# Altium PCB LIMIT_SW_Breakout.pcbdoc
Units mil, origin at the board's own origin, x right, y up, seen from the top; angles counter-clockwise.
Board outline 939.96 x 3877.95 mil, 2 copper layers (Top Layer, Bottom Layer), stack 21 mil thick; 29 components, 21 nets, 79 pads, 2 vias.
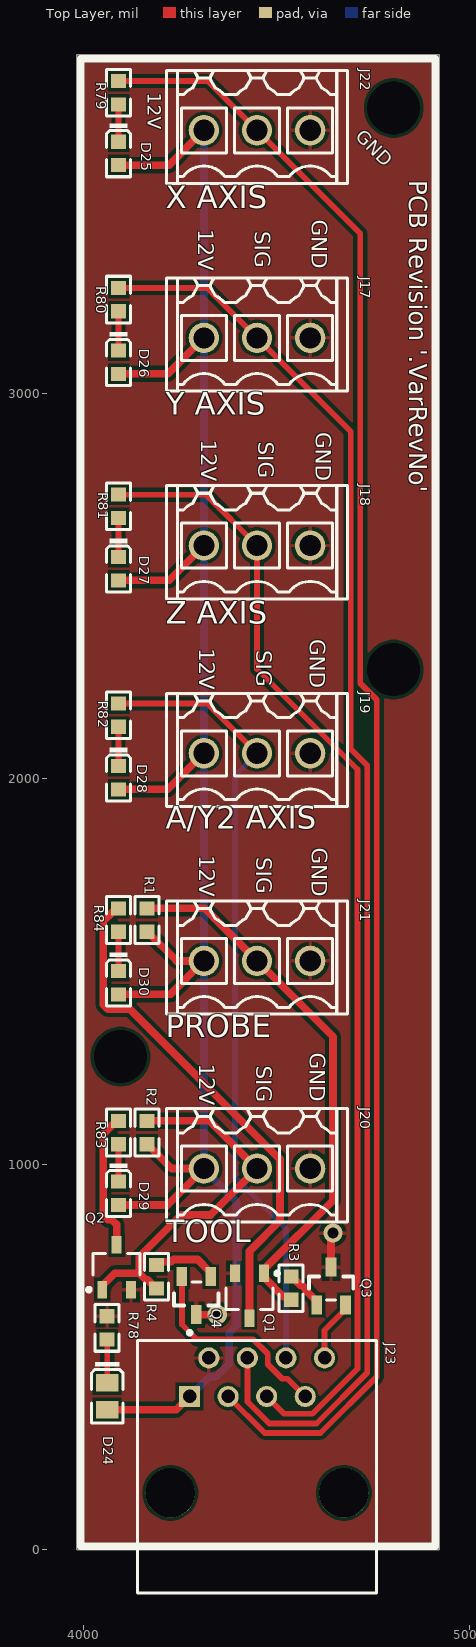
[diagram p0: Top Layer view]
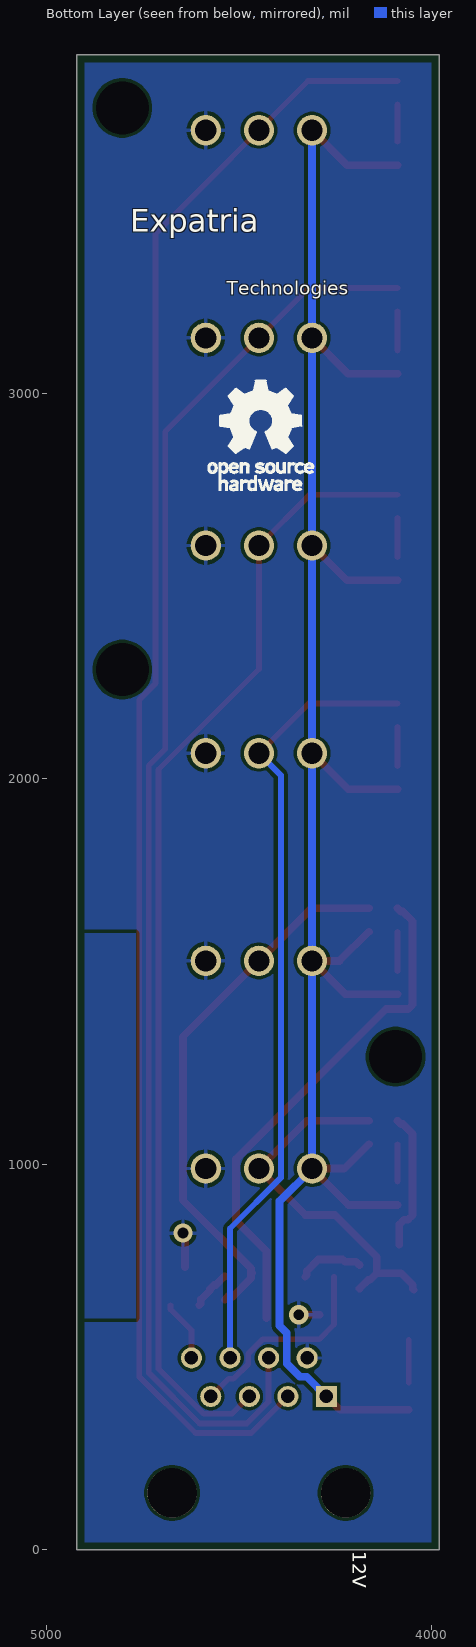
[diagram p1: Bottom Layer view, seen from below]
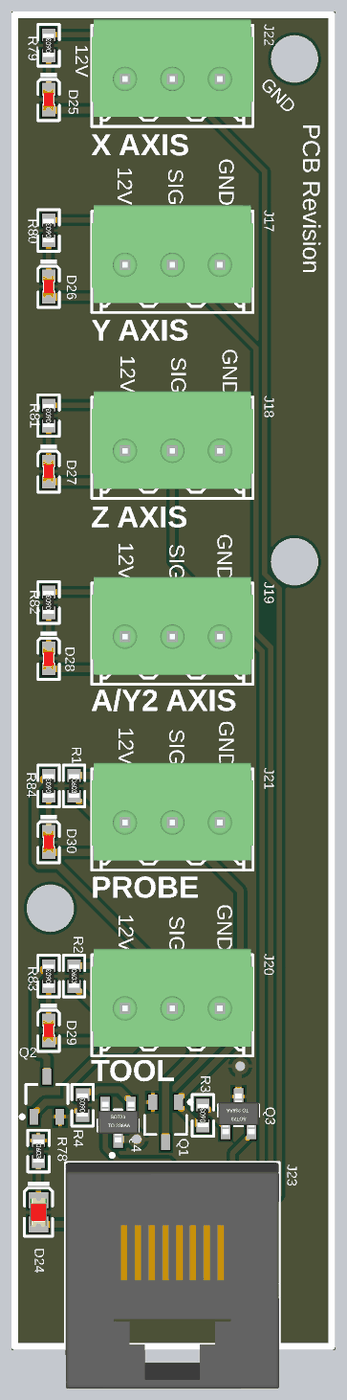
[diagram p2: 3D render of the assembled board from above, using the file's embedded part models]

## Layer stack, top to bottom
Top Solder: solder mask 0.4, Solder Resist, Dk 3.5
Top Layer: signal copper 1.4
Dielectric 3: prepreg 2.8, PP-006, Dk 4.1
Dielectric1: dielectric 12.6, FR-4, Dk 4.8
Dielectric 4: prepreg 2.8, PP-006, Dk 4.1
Bottom Layer: signal copper 1.4
Bottom Solder: solder mask 0.4, Solder Resist, Dk 3.5

## Board outline
3981.3,0 3981.3,3877.95 4921.26,3877.95 4921.26,0

## Design rules (kind name [scope] priority, off if disabled: settings)
BoardOutlineClearance [OnLayer('Top Layer')] p1: gap=20 ignorepadtopadclearanceinfootprint=FALSE
BoardOutlineClearance BoardOutlineClearance_3 [OnLayer('GND')] p2: gap=20 ignorepadtopadclearanceinfootprint=FALSE
BoardOutlineClearance BoardOutlineClearance_2 [OnLayer('PWR')] p3: gap=20 ignorepadtopadclearanceinfootprint=FALSE
BoardOutlineClearance BoardOutlineClearance_1 [OnLayer('Bottom Layer')] p4: gap=20 ignorepadtopadclearanceinfootprint=FALSE
Clearance [All] p1: gap=10 ignorepadtopadclearanceinfootprint=TRUE except(0: SMDPad-Hole Fill-Hole Poly-Hole Region-Hole Text-Hole; 8: SMDPad-Fill SMDPad-Poly SMDPad-Region THPad-Fill THPad-Poly THPad-Region Via-Fill Via-Poly Via-Region; 12: SMDPad-Via THPad-Via; 19.68: THPad-Hole Via-Hole; 20: SMDPad-SMDPad SMDPad-THPad THPad-THPad)
Clearance "Pad Clearance" [IsPad vs IsPad] p2: gap=10 ignorepadtopadclearanceinfootprint=TRUE except(0: Arc-Hole Track-Hole SMDPad-Hole THPad-Hole Via-Hole Fill-Hole Poly-Hole Region-Hole Text-Hole; 8: Arc-Arc Arc-Track Arc-Fill Arc-Poly Arc-Region Track-Track Track-Fill Track-Poly Track-Region SMDPad-Fill SMDPad-Poly SMDPad-Region THPad-Fill THPad-Poly THPad-Region Via-Fill Via-Poly Via-Region; 12: SMDPad-Via THPad-Via; 20: SMDPad-SMDPad SMDPad-THPad THPad-THPad)
DiffPairsRouting [All] p1: maxlimit=10 minlimit=8 mostfreqgap=8 toplayer_minwidth=6 toplayer_maxwidth=15 toplayer_prefwidth=10 bottomlayer_minwidth=6 bottomlayer_maxwidth=15 bottomlayer_prefwidth=10 maxuncoupledlength=500
HoleSize [All] p1: absolutevalues=TRUE maxlimit=200 minlimit=1 maxpercent=80.000 minpercent=20.000
MinimumAnnularRing [All] p1: minimumring=6.3
MinimumSolderMaskSliver [All] p1: minsoldermaskwidth=5
PolygonConnect [All] p1: connectstyle=Relief reliefconductorwidth=10 reliefentries=4 polygonreliefangle="90 Angle" airgapwidth=10
RoutingVias [All] p1: holewidth=28 width=50 viastyle="Through Hole" minholewidth=28 minwidth=50 maxholewidth=28 maxwidth=50 useviatemplates=TRUE viatemplateguid#1={29321985-CF2A-4769-A0B6-67998678A9C6} viatemplatename#1=v70h35m0mx0
SilkToSolderMaskClearance SilkscreenOverComponentPads [IsPad] p1: minsilkscreentomaskgap=10 clearancetoexposedcopper=TRUE
SolderMaskExpansion [All] p1: expansion=4 istentingtop=FALSE
ViasUnderSMD [All] p1: allowed=FALSE
Width [All] p1: maxlimit=200 minlimit=10 preferedwidth=10 minimp=50.000000 maximp=50.000000 favimp=50.000000
26 further rules are at their usual default settings.

## Components (designator, comment, footprint, x,y, rotation, side; value= is the part's Value field where it differs from the comment)
D24 "0805 Green" 0805_LED_S1 4060.04,398.62 r270 top
D25 "0603 Yellow" 0603_LED_S1 4089.57,3622.05 r270 top
D26 "0603 Yellow" 0603_LED_S1 4089.57,3080.71 r270 top
D27 "0603 Yellow" 0603_LED_S1 4089.57,2545.08 r270 top
D28 "0603 Yellow" 0603_LED_S1 4089.57,2002.95 r270 top
D29 "0603 White" 0603_LED_S1 4089.57,925.2 r270 top
D30 "0603 White" 0603_LED_S1 4089.57,1471.46 r270 top
J17 "" SL_3_50_180G_03 4448.82,3152.32 r0 top
J18 "" SL_3_50_180G_03 4448.82,2613.7 r0 top
J19 "" SL_3_50_180G_03 4448.82,2075.08 r0 top
J20 "" SL_3_50_180G_03 4448.82,997.83 r0 top
J21 "" SL_3_50_180G_03 4448.82,1536.46 r0 top
J22 "" SL_3_50_180G_03 4448.82,3690.94 r0 top
J23 "5555799-1" FP-5555799-1-MFG 4448.82,215.35 r0 top
Q1 "AO3400A N" SOT-23-3L 4429.13,659.45 r90 top
Q2 "AO3400A N" SOT-23-3L 4084.65,733.27 r270 top
Q3 "MMBT5401 2L" SOT-23(SOT-23-3) 4640.75,684.06 r270 top
Q4 "MMBT5401 2L" SOT-23(SOT-23-3) 4291.34,659.45 r90 top
R1 "100KΩ ±1%" 0603_R 4163.39,1633.86 r270 top
R2 "100KΩ ±1%" 0603_R 4163.39,1082.68 r270 top
R3 "2KΩ ±1%" 0603_R 4537.4,679.13 r90 top
R4 "2KΩ ±1%" 0603_R 4187.99,708.66 r90 top
R78 "10KΩ ±1%" 0603_R 4060.04,575.79 r270 top
R79 "2KΩ ±1%" 0603_R 4089.57,3779.53 r90 top
R80 "2KΩ ±1%" 0603_R 4089.57,3243.11 r90 top
R81 "2KΩ ±1%" 0603_R 4089.57,2706.69 r90 top
R82 "2KΩ ±1%" 0603_R 4089.57,2165.35 r90 top
R83 "2KΩ ±1%" 0603_R 4089.57,1082.68 r90 top
R84 "2KΩ ±1%" 0603_R 4089.57,1633.86 r90 top

## Footprints (in the part's own frame and the unit in brackets; to place one, negate y for a bottom-side part, rotate by r counter-clockwise, add the part's x,y. Pads: shape width x height; smd on the part's side, far side on the other; paste and mask are expansions set on the pad)
0603_LED_S1 [mm]
  rect 0.93x0.98 smd: A(0.77,0) K(-0.77,0)
  silkscreen extent -1.98,-0.79 1.54,0.79, body extent -0.8,-0.4 0.8,0.4, height 0.6
0603_R [mm]
  rect 0.93x0.98 smd: 1(-0.77,0) 2(0.77,0)
  silkscreen extent -1.53,-0.79 1.54,0.79, body extent -0.85,-0.4 0.85,0.4, height 0.56
0805_LED_S1 [mm]
  rect 1.16x1.47 smd: A(0.89,0) K(-0.89,0)
  silkscreen extent -2.24,-1.04 1.77,1.03, body extent -1.01,-0.62 1.01,0.62, height 1.1
FP-5555799-1-MFG [mm]
  rect 1.39x1.39 hole 0.89 paste-1000 mask+0: 1(-4.445,4.64)
  round 1.39 hole 0.89 paste-1000 mask+0: 2(-3.175,7.18) 3(-1.905,4.64) 4(-0.635,7.18) 5(0.635,4.64) 6(1.905,7.18) 7(3.175,4.64) 8(4.445,7.18)
  round 3.25 hole 3.25 unplated paste-1000 mask+0: ""(-5.715,-1.71) ""(5.715,-1.71)
  silkscreen extent -7.88,-8.32 7.88,8.96, body extent -7.98,-8.42 7.98,8.42, height 0.25
SL_3_50_180G_03 [mm] "OMNIMATE Signal - Serie BL/SL 3.50  SL 3.50/03/180G 3.2"
  round 2 hole 1.4: A1(-3.5,-0.22) A2(0,-0.22) A3(3.5,-0.22)
  silkscreen extent -5.95,-3.73 5.95,3.73, body extent -5.95,-3.02 5.95,4.18, height 9.3
SOT-23(SOT-23-3) [mm]
  rect 1.25x0.7 smd: 1(1.25,-0.95) 2(1.25,0.95) 3(-1.25,0)
  silkscreen extent -0.65,-1.46 0.9,1.46, body extent -1.5,-1.5 1.5,1.5, height 1.3
SOT-23-3L [mm] "http://www.aosmd.com/res/packaging_information/SOT-23-3L.pdf"
  rect 1.15x0.65 smd: 1(1.475,-0.95) 2(1.475,0.95) 3(-1.475,0)
  silkscreen extent -0.9,-1.95 1.6,1.55, body extent -0.9,-1.55 0.9,1.55, height 1.25

## Part data
D24: library part "0805 LED Green", "LED", Color=Green, Package=0805, SuppliersPartNumber=C2297, Supplier=LC
D25 D26 D27 D28: library part "0603 LED Yellow", "LED", Color=Yellow, Package=0603, SuppliersPartNumber=C72038, Supplier=LC
D29 D30: library part "0603 LED White", "LED", Color=White, Package=0603, SuppliersPartNumber=C2290, Supplier=LC
J17 J18 J19 J20 J21 J22: library part CMP-1559-00904-1, "Header,Male Pin,Covered(4 Sided) 3 1 0.138\"（3.50mm） 3 P=3.5mm Pluggable System Terminal Block RoHS", Manufacturer="Ningbo Kangnex Elec", PartNumber=WJ15EDGVC-3.5-3P, SuppliersPartNumber=C192778, UL_94_flammability_rating=V-0, PackageReference=SL_3_50_180G_03, Packaging=Box, Pitch_inch="0.138 inch", Pitch_mm="3.5 mm", Revision=V1, Short_text_for_material="SL 3.50/03/180G 3.2SN OR BX", Side_termination_characteristic="closed side", Solder_pin_length_mm="3.2 mm"
J23: library part CMP-03371-000003-1, "CONN MOD JACK 8P8C VERT UNSHLD", Manufacturer="TE Connectivity", SuppliersPartNumber=C305983, Temperature="-40°C to +85°C", Temperature Range High=+85°C, Temperature Range Low=-40°C, Device Class L1=Connectors, Device Class L2="Modular / Ethernet Connectors", Device Class L3=unset, Digikey Description="CONN MOD JACK 8P8C VERT UNSHLD", Is Female=yes, Manufacturer Part Number=5555799-1, Mouser Description="Conn RJ-45 F 8 POS 2.54mm Solder ST Thru-Hole 8 Terminal 1 Port Cat 3 Box/Package/Tray", Number of Contacts=8, Octopart=https://octopart.com/5555799-1-te+connectivity-39526335, Package=5555799-1, Pitch=2.54mm
Q1 Q2: library part "AO3400A N道沟 X0YV1T SOT-23", "MOS(场效应管)", Package=SOT-23, SuppliersPartNumber=C700953, ComponentLink1Description=供应商链接, ComponentLink1URL=http://www.szlcsc.com/product/details_21629.html, Supplier=LC
Q3 Q4: library part "SOT-23 MMBT5401 2L", "三极管", Package=SOT-23, SuppliersPartNumber=C8326, ComponentLink1Description=供应商链接, ComponentLink1URL=http://www.szlcsc.com/product/details_8818.html, Supplier=LC
R1 R2: library part "0603 100K (1003) 1%", "Chip resistor", Manufacturer="Uniroyal Elec", Package=0603, PartNumber=0603WAF1003T5E, Power=1/10W, Resistance=100KΩ, SuppliersPartNumber=C25803, Tolerance=1%, ComponentLink1Description="Supplier link", ComponentLink1URL=http://www.szlcsc.com/product/details_26546.html, Supplier=LC
R3 R4 R79 R80 R81 R82 R83 R84: library part "0603 2K (2001) 1%", "Chip resistor", Manufacturer="Uniroyal Elec", Package=0603, PartNumber=0603WAF2001T5E, Power=1/10W, Resistance=2KΩ, SuppliersPartNumber=C22975, Tolerance=1%, ComponentLink1Description="Supplier link", ComponentLink1URL=http://www.szlcsc.com/product/details_23702.html, Supplier=LC
R78: library part "0603 10K (1002) 1%", "Chip resistor", Manufacturer="Uniroyal Elec", Package=0603, PartNumber=0603WAF1002T5E, Power=1/10W, Resistance=10KΩ, SuppliersPartNumber=C25804, Tolerance=1%, ComponentLink1Description="Supplier link", ComponentLink1URL=http://www.szlcsc.com/product/details_26547.html, Supplier=LC

## Free pads (board coordinates)
  round 0 hole 137.8 unplated: 0(4094.49,1279.53) 0(4803.15,2283.46) 0(4803.15,3740.16)

## Via types
v1: diameter 50, hole 28, Top Layer to Bottom Layer, tented both sides, 2 vias

## Nets (pads, with @x,y where several pads share a name; then routed paths per layer and width w, separated by ;. In a path a pad name is that pad's centre, name@x,y a point inside that pad or via, vN(x,y) a via of type N, cw(c..) or ccw(c..) an arc to the next point about the centre after c; other vN are vias at no path point)
+12V_SWITCH: D24.A D25.A D26.A D27.A D28.A D29.A D30.A J17.A1 J18.A1 J19.A1 J20.A1 J21.A1 J22.A1 J23.1 R1.2 R2.2 | length 5516.4
  Top Layer w20: D24.A 4239.37,363.58 J23.1 ; D29.A 4216.73,894.88 J20.A1 4227.56,989.17 4164.37,1052.36 R2.2 ; D30.A 4224.37,1441.14 J21.A1 4240.12,1527.8 4164.37,1603.54 R1.2 ; D28.A 4217.24,1972.64 J19.A1 ; D27.A 4220.75,2514.76 J18.A1 ; D26.A 4217.76,3050.39 J17.A1 ; D25.A 4220.47,3591.73 J22.A1
  Bottom Layer w20: J23.1 4325.33,449.54 4342.31,449.54 4376.46,483.69 4376.46,562.82 4395.39,581.75 4395.39,904.8 J20.A1 J22.A1
A_LIM_SWITCH: J19.A2 J23.6 R82.2 | length 2059.4
  Top Layer w15: R82.2 4319.57,2195.67 J19.A2
  Bottom Layer w15: J19.A2 4391.95,2009.55 4391.95,965.62 4523.82,833.75 J23.6
GND_SWITCH: J17.A3 J18.A3 J19.A3 J20.A3 J21.A3 J22.A3 J23.2 Q1.2 Q2.2 Q3.3 Q4.3 R78.1 | length 144.8
  Top Layer w20: Q4.3 v1(4345.47,610.24) ; Q3.3 4640.75,816.93 v1(4645.67,821.85)
NetD24_K: D24.K R78.2 | length 111.8
  Top Layer w15: D24.K R78.2
NetD25_K: D25.K R79.1 | length 96.9
  Top Layer w15: D25.K R79.1
NetD26_K: D26.K R80.1 | length 101.8
  Top Layer w15: D26.K R80.1
NetD27_K: D27.K R81.1 | length 101
  Top Layer w15: D27.K R81.1
NetD28_K: D28.K R82.1 | length 101.8
  Top Layer w15: D28.K R82.1
NetD29_K: D29.K R83.1 | length 96.9
  Top Layer w15: D29.K R83.1
NetD30_K: D30.K R84.1 | length 101.8
  Top Layer w15: D30.K R84.1
NetQ1_3: Q1.3 R84.2 | length 1338.9
  Top Layer w20: R84.2 4088.58,1664.17 4080.28,1655.87 4076.01,1655.87 4050.28,1630.13 4050.28,1414.55 4061.99,1402.83 4117.14,1402.83 4118.13,1403.82 4508.19,1013.77 4508.19,853.42 4429.13,774.36 Q1.3
NetQ2_3: Q2.3 R83.2 | length 361.1
  Top Layer w20: Q2.3 4084.65,843.98 4072.49,856.13 4062.43,856.13 4050.28,868.29 4050.28,1078.95 4076.01,1104.69 4081.26,1104.69 R83.2
NetQ3_1: Q3.1 R3.2 | length 105
  Top Layer w20: R3.2 4538.39,709.45 4560.71,687.13 4564.98,687.13 4576.69,675.41 4576.69,672.32 4599.57,649.45 4599.57,638.62 Q3.1
NetQ4_1: Q4.1 R4.2 | length 171.5
  Top Layer w20: R4.2 4196.3,747.28 4225.89,747.28 4231.87,753.27 4294.96,753.27 4324.96,723.27 4324.96,712.44 Q4.1
PROBE_CONN: J21.A2 Q1.1 R1.1 R3.1 | length 1413.3
  Top Layer w20: R1.1 4312.44,1664.17 4645.98,1330.63 4645.98,906.81 4469.33,730.16 4469.33,720.32 Q1.1 4469.33,714.72 4469.33,704.88 4517.09,657.13 4529.09,657.13 R3.1
PROBE_SWITCH: J23.8 Q3.2 | length 159.3
  Top Layer w15: J23.8 4623.82,569.68 4678.15,624.02 Q3.2
TOOL_CONN: J20.A2 Q2.1 R2.1 R4.1 | length 960
  Top Layer w20: Q2.1 4050.04,677.99 4050.04,687.83 4080.04,717.83 4143.13,717.83 ; R2.1 4325,1112.99 J20.A2 4328.61,868.96 4252.1,868.96 4143.13,759.99 4143.13,717.83 ; R4.1 4187.01,678.35 4164.68,700.67 4160.29,700.67 4143.13,717.83
TOOL_SWITCH: J23.7 Q4.2 | length 537
  Top Layer w15: Q4.2 4253.94,584.5 4291.78,546.66 4438.64,546.66 4476.48,508.81 4476.48,481.92 4514.48,443.93 4527.92,443.93 J23.7
X_LIM_SWITCH: J22.A2 J23.3 R79.2 | length 4259.1
  Top Layer w15: R79.2 4321.26,3809.84 4716.75,3414.35 4716.75,2247.68 4759.43,2205 4759.43,449.49 4613.11,303.17 4468.68,303.17 J23.3
Y_LIM_SWITCH: J17.A2 J23.4 R80.2 | length 3717.1
  Top Layer w15: R80.2 4319.05,3273.43 4691.75,2900.73 4691.75,2077.06 4734.43,2034.38 4734.43,459.84 4602.76,328.17 4480.24,328.17 4423.82,384.59 J23.4
Z_LIM_SWITCH: J18.A2 J23.5 R81.2 | length 2959.4
  Top Layer w15: R81.2 4316.85,2737.01 J18.A2 4448.82,2284.64 4709.43,2024.03 4709.43,470.2 4592.4,353.17 4518.68,353.17 J23.5
pads on no net: J23.

## Polygon pours and split planes (outlines as drawn)
GND_SWITCH on Bottom Layer "GND_SWITCH_L02_P001" (solid, remove dead copper, pour order 1): 3981.3,0 3981.3,3877.95 4921.26,3877.95 4921.26,0
no net on Bottom Layer "NONET_L-01_P-001" (solid, pour order 0): 4965.55,1599.41 4768.7,1599.41 4768.7,600.39 4965.55,600.39
GND_SWITCH on Top Layer "GND_SWITCH_L01_P002" (solid, remove dead copper, pour order 2): 3981.3,0 3981.3,3877.95 4921.26,3877.95 4921.26,0

## Silkscreen, mask and mechanical layers (free items; w line width, h text height)
Top Overlay:
  lines w19.68: 3991.14,9.84 4911.42,9.84 4911.42,3868.11 3991.14,3868.11 3991.14,9.84
  text "12V" at 4153.54,3779.53 h60 r270
  text "GND" at 4693.3,3654.85 h60 r315
  text "PCB Revision '.VarRevNo'" at 4827.76,3553.15 h80 r270
  text "X AXIS" at 4212.6,3460.83 h100
  text "GND" at 4576.77,3449.8 h70 r270
  text "12V" at 4281.5,3425.2 h70 r270
  text "SIG" at 4429.13,3420.28 h70 r270
  text "Y AXIS" at 4212.53,2924.41 h100
  text "GND" at 4586.61,2898.62 h70 r270
  text "12V" at 4289.88,2879.57 h70 r270
  text "SIG" at 4437.52,2874.65 h70 r270
  text "Z AXIS" at 4212.6,2383.07 h100
  text "GND" at 4571.85,2362.2 h70 r270
  text "12V" at 4284.96,2338.23 h70 r270
  text "SIG" at 4432.6,2333.31 h70 r270
  text "A/Y2 AXIS" at 4212.6,1851.57 h100
  text "GND" at 4576.77,1820.87 h70 r270
  text "12V" at 4284.96,1801.82 h70 r270
  text "SIG" at 4432.6,1796.9 h70 r270
  text "PROBE" at 4212.6,1310.23 h100
  text "GND" at 4571.85,1289.37 h70 r270
  text "12V" at 4284.96,1260.48 h70 r270
  text "SIG" at 4432.6,1255.56 h70 r270
  text "TOOL" at 4212.6,778.74 h100
Bottom Overlay:
  drawing of 679 lines, arcs and shapes, not listed
  text "Expatria" at 4782.41,3399.27 h100
  text "Technologies" at 4532.06,3244.17 h60
  text "12V" at 4217.17,-2.93 h60 r90
  text "12V" at 4217.17,-2.93 h60 r90
Bottom Solder:
  region: 4864.27,684.22 4887.87,683.03 4887.87,687.86 4864.7,686.65 cw(c4864.71,689.35) 4862.05,688.88 cw(c4868.08,689.12) 4862.07,689.63 4866.12,712.7 4857.53,709.58 cw(c4856.65,712.77) 4856.92,709.47 cw(c4856.92,711.22) 4855.57,710.12 4835.11,735.38 4832.45,729.69 cw(c4830.87,730.44) 4830.87,728.69 cw(c4830.87,730.44) 4830.33,728.78 4814.97,733.77 4818.06,719.22 cw(c4816.06,719.01) 4817.04,717.26 4810.41,714.44 4822.6,703.08 cw(c4821.4,701.82) 4823.14,701.82 cw(c4821.34,701.86) 4821.61,700.08 cw(c4821.79,713.7) 4821.07,700.1 4792.82,705.58 4797.9,696.8 cw(c4796.39,695.92) 4798.14,695.92 cw(c4796.39,695.92) 4797.17,694.36 4779.66,685.44 4797.17,676.53 cw(c4796.39,674.97) 4798.14,674.97 cw(c4796.39,674.97) 4797.9,674.09 4792.82,665.31 4821.07,670.78 cw(c4821.2,668.8) 4823.13,669.29 cw(c4821.14,669.16) 4822.6,667.8 4810.41,656.44 4817.04,653.63 cw(c4816.35,652.02) 4818.1,652.02 4814.97,637.11 4830.33,642.11 cw(c4830.87,640.45) 4830.87,642.19 cw(c4830.87,640.45) 4832.45,641.19 4835.11,635.5 4855.57,660.77 cw(c4856.92,659.67) 4856.92,661.41 cw(c4856.92,659.67) 4857.53,661.3 4866.12,658.19 4862.07,681.25 cw(c4873.08,682.19) 4862.03,681.82 cw(c4864.58,681.69)
  text "Designed in Canada" at 4872.77,1564.96 h100 r90
Mechanical 6:
  lines w19.68: 3981.3,0 3981.3,3877.95 3996.06,3877.95 4921.26,3877.95 4921.26,0 3981.3,0
Mechanical 15:
  lines w10: 8600,6131.73 8600,6231.72 8600.01,6231.73